# EAGLE board dribbler_boost (EAGLE 5.10)
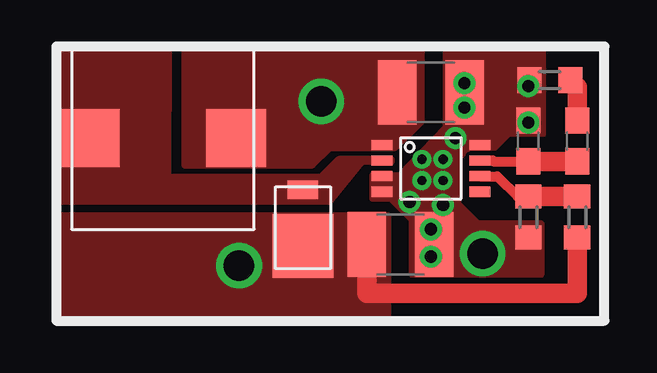
[diagram p0: board, top side]
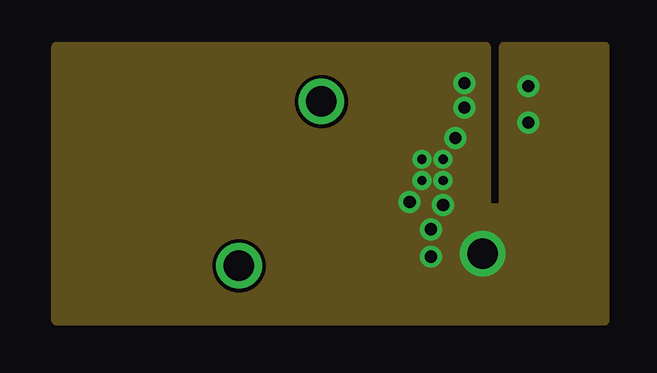
[diagram p1: board, inner layer Route2]
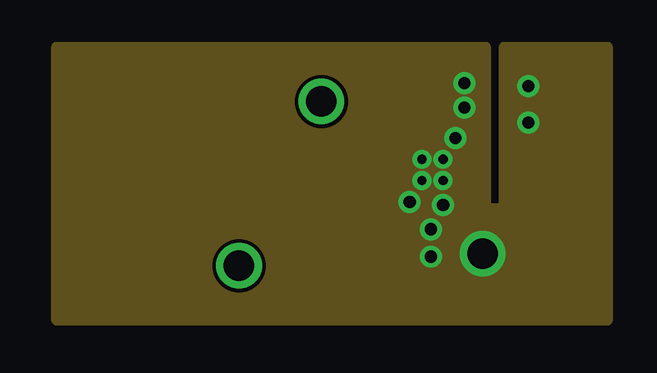
[diagram p2: board, inner layer Route15]
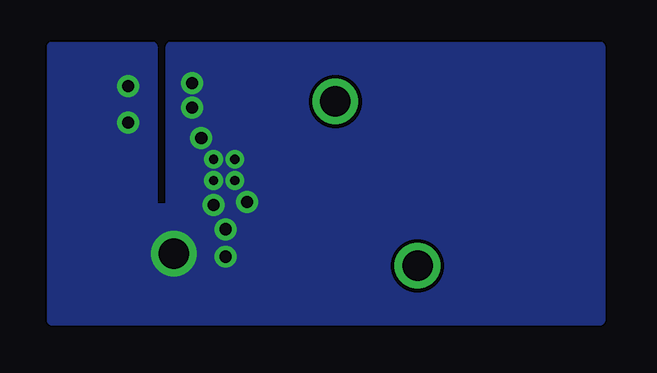
[diagram p3: board, bottom side, seen from below]

No outline drawn. Coordinates in mm, seen from the top.
Copper layers (1*2+15*16): Top 0.035mm / dielectric 0.5mm / Route2 0.035mm / dielectric 0.43mm / Route15 0.035mm / dielectric 0.5mm / Bottom 0.035mm
Design rules "default *": minimum track width 4mil, minimum drill 8mil, track to track 6mil, track to pad 6mil, pad to pad 6mil, via to via 6mil, smd to smd 0mil, copper to edge 20mil, drill to drill 10mil, minimum pad ring 10mil, minimum via ring 8mil, stop-mask expansion 4mil, vias tented up to drill 0mil, thermal gap 10mil

## Footprints (pad centres in the part's own frame; a part is rotated, then mirrored left to right if it is on the bottom)
C1210 = smd 1.6 x 2.7: 1 -1.4,0; 2 1.4,0
C0603 = smd 1.1 x 1: 1 -0.85,0; 2 0.85,0
R0603 = smd 1 x 1.1: 1 -0.85,0; 2 0.85,0
MSOP8 = smd 0.889 x 0.419: 1 -2.045,0.975; 2 -2.045,0.325; 3 -2.045,-0.325; 4 -2.045,-0.975; 5 2.045,-0.975; 6 2.045,-0.325; 7 2.045,0.325; 8 2.045,0.975
SRP7030F = smd 2.489 x 2.413: P$1 -3.048,0; P$2 3.048,0
SS3P3-M3 = smd 2.667 x 2.54: 1 -1.333,0 | smd 0.762 x 1.27: 2 1.016,0

## Placement (x,y rotation side)
C1  10u  [C1210]  15.62,9.53 0 top
C2  100p  [C0603]  19.68,7.49 90 top
C3  6800p  [C0603]  21.72,7.49 90 top
C4  10u  [C1210]  14.35,3.17 0 top
R1  158k  [R0603]  21.72,4.32 270 top
R2  10k  [R0603]  19.68,4.32 90 top
R3  6.8k  [R0603]  20.57,10.03 0 top
U$1  LT1961  [MSOP8]  15.62,6.35 0 top
U$2  SRP7030F  [SRP7030F]  4.45,7.62 180 top
U$3  SS3P3-M3  [SS3P3-M3]  10.29,4.45 90 top

## Library data of the parts
C1-C4 R1-R3 = rcl
U$1-U$3 = rfc

## Nets
+12V: C1.1 U$1.1 U$2.P$1
N$1: U$1.2 U$2.P$2 U$3.2
N$3: R1.1 R2.2 U$1.6
N$5: C2.1 C3.1 U$1.7
N$6: C3.2 R3.2
PE: C1.2 C2.2 C4.2 R2.1 R3.1 U$1.3 U$1.4 U$1.8
VOUT: C4.1 R1.2 U$3.1

## Tracks (layer width: path | path; a pad name or v marks a point on that pad's centre or on a via)
+12V  (via drill 1.27)
  other vias: 11.05,9.14
  pour Top (no thermals): 15.24,11.43 5.33,11.43 5.33,6.48 10.69,6.48 11.43,7.19 14.12,7.19 15.24,8.31
N$1
  pour Top (no thermals): 4.7,11.43 0,11.43 0,4.95 11.4,4.98 12.78,6.63 14,6.63 14,6.73 11.76,6.73 11.02,5.99 4.67,5.99
N$3
  Top 0.406: R2.2 19.24,5.17 18.39,6.02 U$1.6
  Top 0.813: R2.2 R1.1
N$5
  Top 0.406: C2.1 18.22,6.64 18.19,6.68 U$1.7
  Top 0.813: C2.1 C3.1
N$6
  Top 0.813: C3.2 21.72,9.74 R3.2
PE  (via drill 0.38, 0.51, 1.27)
  other vias: 17.02,9.91 19.68,9.78 19.68,8.26 17.02,8.89 16.13,4.83 14.73,4.95 15.24,6.73 16.64,7.62 15.62,3.81 17.78,2.79 15.62,2.67 16.13,6.73 16.13,5.84 15.24,5.84
  pour Top (no thermals): 14.83,1.91 14.83,4.19 13.94,5.08 13.18,5.08 13.18,6.07 14.3,6.07 16.26,8.1 16.26,11.43 20.29,11.43 20.29,7.77 18.85,7.77 18.26,7.19 17.2,7.19 16.74,6.73 16.74,4.88 17.55,4.06 20.22,4.06 20.22,1.91
  pour Bottom (no thermals): 0,11.43 0,0 22.86,0 22.86,11.43 18.67,11.43 18.67,4.7 17.91,4.7 17.91,11.43
  pour Route2 (no thermals): 0,0 0,11.43 17.91,11.43 17.91,4.7 18.67,4.7 18.67,11.43 22.86,11.43 22.86,0
  pour Route15 (no thermals): 0,0 0,11.43 17.91,11.43 17.91,4.7 18.67,4.7 18.67,11.43 22.99,11.43 22.99,0
VOUT  (via drill 1.27)
  Top 0.813: R1.2 21.72,1.14 12.95,1.14 C4.1
  other vias: 7.62,2.29
  pour Top (no thermals): 13.84,4.39 0,4.39 0,0 13.84,0